# Altium PCB TCS230颜色识别.PCBDOC
Units mm, origin at the board's own origin, x right, y up, seen from the top; angles counter-clockwise.
Board outline 152.4 x 101.6 mm, 2 copper layers (Top Layer, Bottom Layer); 14 components, 7 nets, 40 pads, 2 vias.
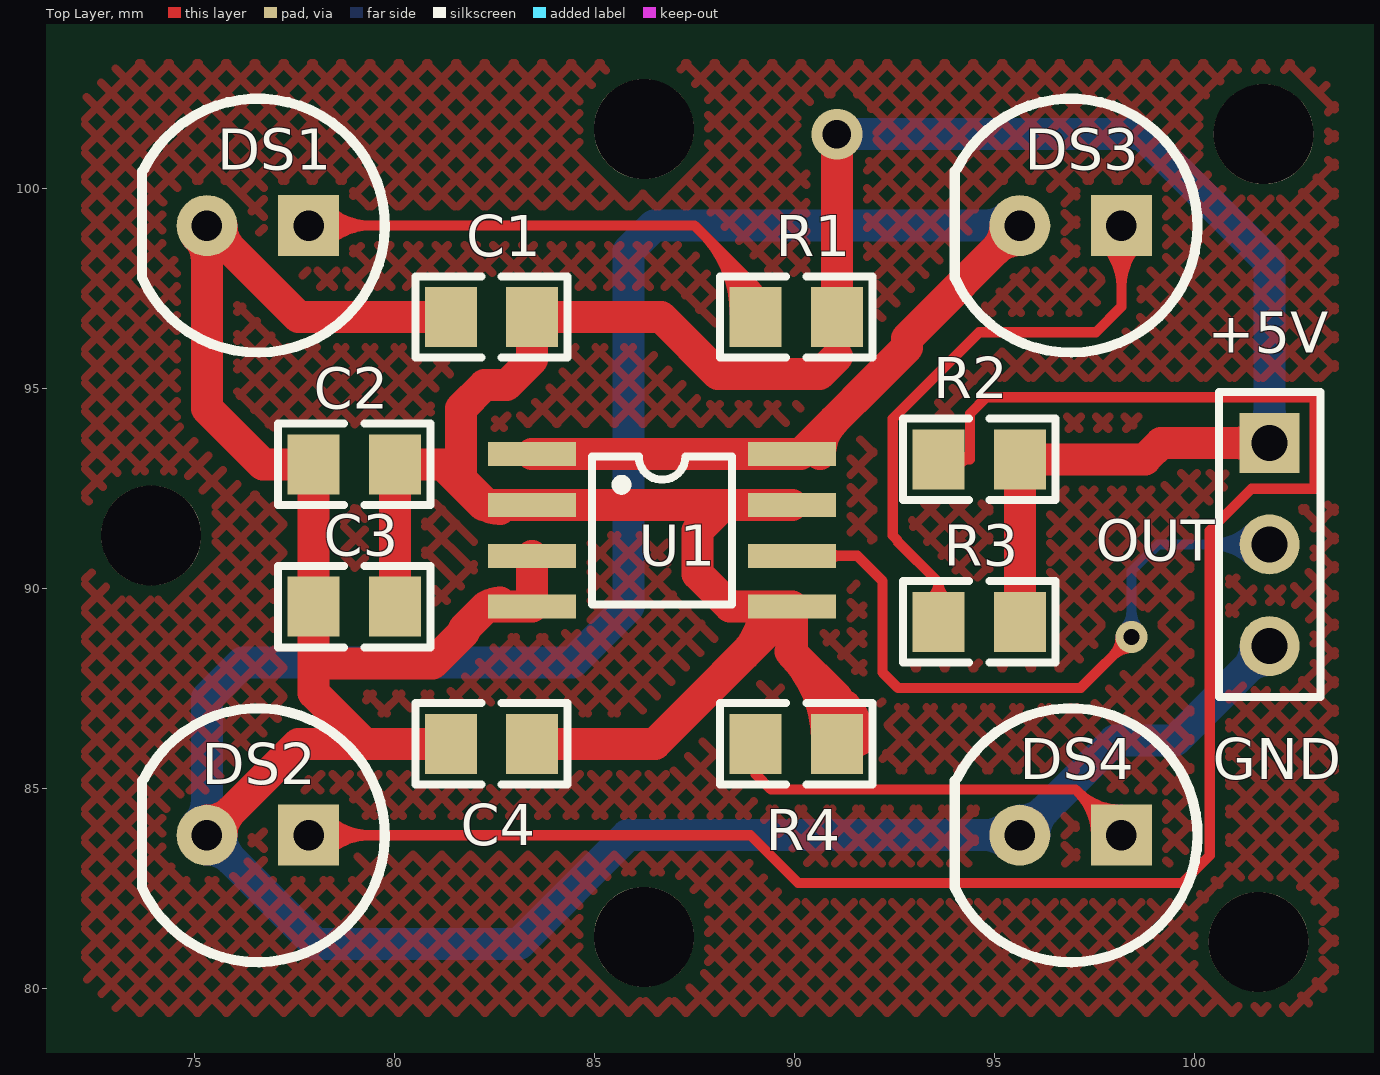
[diagram p0: Top Layer view]
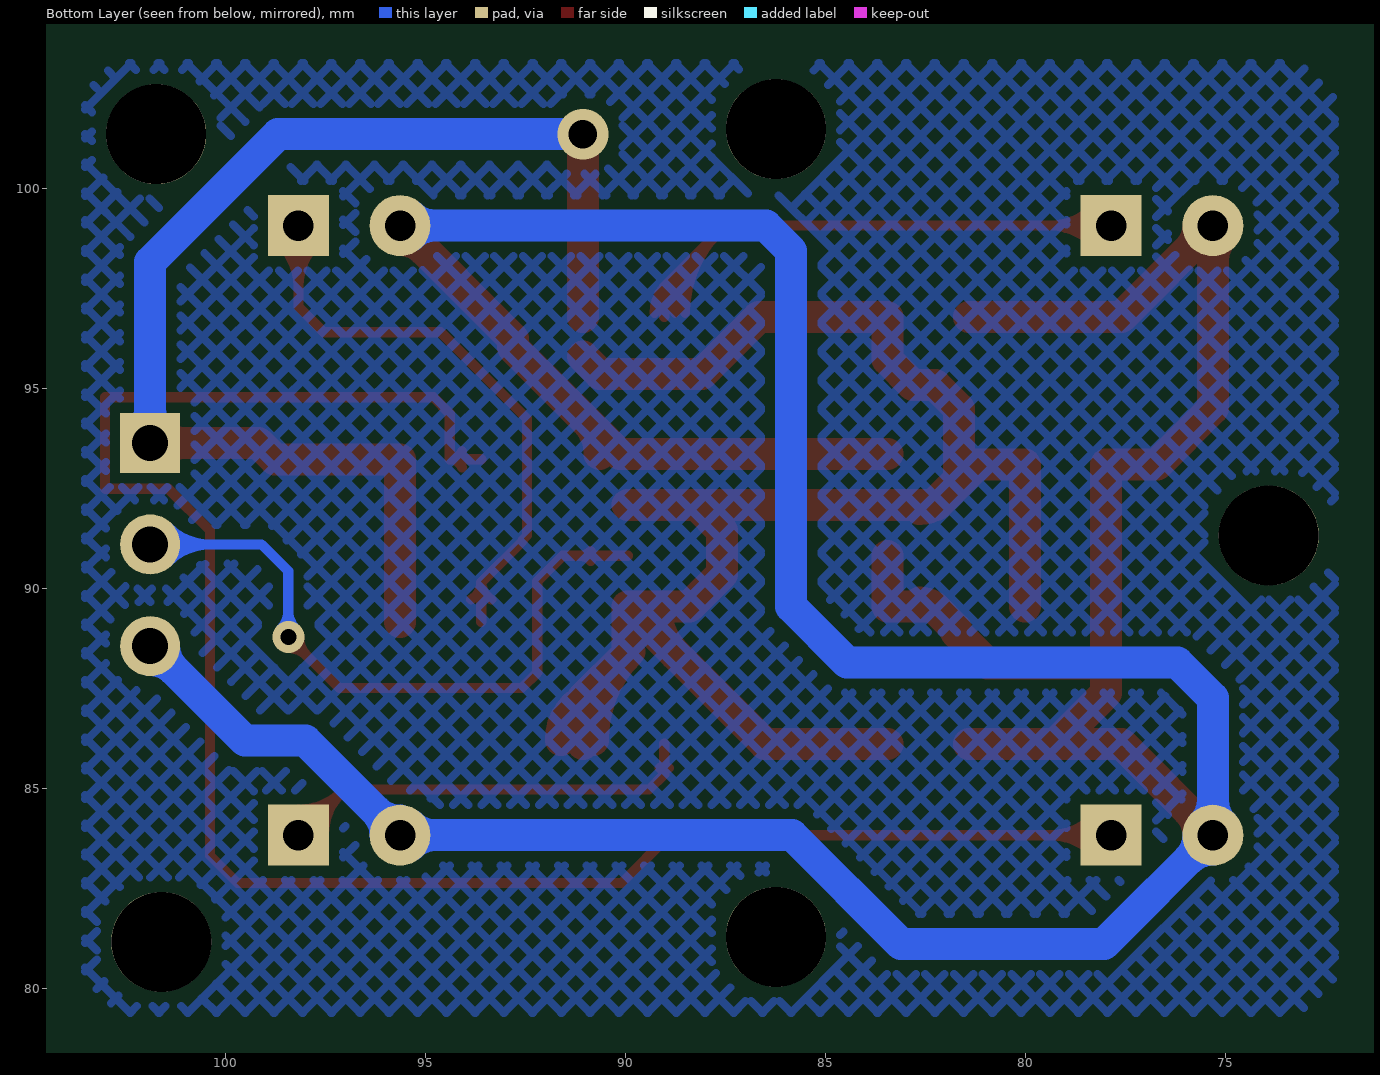
[diagram p1: Bottom Layer view, seen from below]

## Layer stack, top to bottom
Top Layer: signal copper 0.0356
Dielectric: dielectric 0.32, FR-4, Dk 4.8
Bottom Layer: signal copper 0.0356

## Board outline
25.4,25.4 177.8,25.4 177.8,127 25.4,127

## Design rules (kind name [scope] priority, off if disabled: settings)
Clearance [All] p1: gap=0.254
ComponentClearance [All] p1: gap=0.254 collisioncheckmode=3 verticalgap=0.254
PolygonConnect [All] p1: connectstyle=Relief reliefconductorwidth=0.254 reliefentries=4 polygonreliefangle="90 Angle"
RoutingVias [All] p1: holewidth=0.711 width=1.27 viastyle="Through Hole" minholewidth=0.711 minwidth=1.27 maxholewidth=0.711 maxwidth=1.27
SolderMaskExpansion [All] p1: expansion=0.102
TestPointUsage [All] p1: valid=0 allowmultiple=FALSE
Testpoint [All] p1: side=15 testpointundercomponent=TRUE minsize=1.016 maxsize=2.54 preferedsize=1.524 minholesize=0 maxholesize=1.016 preferedholesize=0.813 testpointgrid=0.025 style=1023 order=0123456789
Width Width_2 [InNet('GND')] p1: maxlimit=0.8 minlimit=0.8 preferedwidth=0.8
Width Width_1 [InNet('VCC')] p2: maxlimit=0.8 minlimit=0.8 preferedwidth=0.8
Width [All] p3: maxlimit=0.254 minlimit=0.254 preferedwidth=0.254
17 further rules are at their usual default settings.

## Components (designator, comment, footprint, x,y, rotation, side; value= is the part's Value field where it differs from the comment)
C1 "" TP-0805-R 84.963,95.504 r0 top
C2 "" TP-0805-R 81.534,91.821 r0 top
C3 "" TP-0805-R 81.534,88.265 r0 top
C4 "" TP-0805-R 84.963,84.836 r0 top
DS1 "LED1" LED_5 75.311,96.52 r180 top
DS2 "LED1" LED_5 75.311,81.28 r180 top
DS3 "LED1" LED_5 95.631,96.52 r180 top
DS4 "LED1" LED_5 95.631,81.28 r180 top
JP1 "PZ_3" HDR-3 100.711,87.376 r270 top
R1 "Res2" TP-0805-R 92.583,95.504 r0 top
R2 "Res2" TP-0805-R 97.155,91.948 r0 top
R3 "Res2" TP-0805-R 97.155,87.884 r0 top
R4 "Res2" TP-0805-R 92.583,84.836 r0 top
U1 "TCS230" CDFP-8 82.931,88.9 r270 top

## Footprints (in the part's own frame and the unit in brackets; to place one, negate y for a bottom-side part, rotate by r counter-clockwise, add the part's x,y. Pads: shape width x height; smd on the part's side, far side on the other; paste and mask are expansions set on the pad)
CDFP-8 [mm] "贴片8管脚"
  rect 0.6x2.2 smd: 1(-4.445,0.508) 2(-3.175,0.508) 3(-1.905,0.508) 4(-0.635,0.508) 5(-0.635,7.008) 6(-1.905,7.008) 7(-3.175,7.008) 8(-4.445,7.008)
  silkscreen extent -4.39,2.01 -0.69,5.51
HDR-3 [mm] "3排针"
  rect 1.5x1.5 hole 0.9: 1(-6.253,1.165)
  round 1.5 hole 0.9: 2(-3.713,1.165) 3(-1.173,1.165)
  silkscreen extent -7.52,-0.11 0.1,2.43
LED_5 [mil] "发光二极管 5MM"
  rect 60x60 hole 30: 1(-100,-100)
  round 60 hole 30: 2(0,-100)
  silkscreen extent -175,-225 64,25
TP-0805-R [mm] "贴片0805"
  rect 1.3x1.5 smd: 1(-3.556,1.27) 2(-1.524,1.27)
  silkscreen extent -4.44,0.25 -0.64,2.29

## Part data
C1 C2 C3 C4: library part CPDR, "瓷片电容"
DS1 DS2 DS3 DS4: "Typical RED GaAs LED"
JP1: "排针——3"
R1 R2 R3 R4: "Resistor"
U1: "颜色识别传感器"

## Free pads (board coordinates)
  round 2.5 hole 2.5: 6(73.914,91.313) 6(86.233,81.28) 6(86.233,101.473) 6(101.6,81.153) 6(101.727,101.346)

## Via types
v1: diameter 1.27, hole 0.711, Top Layer to Bottom Layer, 1 vias
v2: diameter 0.8, hole 0.4, Top Layer to Bottom Layer, 1 vias

## Nets (pads, with @x,y where several pads share a name; then routed paths per layer and width w, separated by ;. In a path a pad name is that pad's centre, name@x,y a point inside that pad or via, vN(x,y) a via of type N, cw(c..) or ccw(c..) an arc to the next point about the centre after c; other vN are vias at no path point)
GND: C1.1 C2.1 C3.1 C4.1 DS1.2 DS2.2 DS3.2 DS4.2 JP1.3 U1.1 U1.3 U1.4 U1.8 | length 131.6
  Top Layer w0.8: DS1.2@75.055,98.804 cw(c74.437,98.186) 75.311,98.186 cw(c76.185,98.186) DS1.2@75.567,98.804 ; DS2.2 77.597,86.106 79.248,86.106 ; DS2.2@75.311,84.182 ccw(c75.311,85.056) 75.929,84.438 ccw(c76.547,83.82) DS2.2@75.673,83.82 ; DS1.2@75.311,98.698 cw(c75.311,97.824) 75.929,98.442 cw(c76.547,99.06) DS1.2@75.673,99.06 ; C4.1 79.248,86.106 ; C1.1 77.597,96.774 DS1.2 75.311,94.488 76.708,93.091 C2.1 C3.1 77.978,88.113 ; U1.3 U1.4 82.296,89.535 81.737,88.976 81.737,88.9 80.95,88.113 77.978,88.113 ; U1.1 U1.8 90.145,93.345 92.812,96.012 92.812,96.241 DS3.2 ; U1.8@90.639,93.345 cw(c91.833,93.345) 90.989,94.189 ; DS3.2@95.269,99.06 cw(c94.395,99.06) 95.013,98.442 cw(c95.631,97.824) DS3.2@95.631,98.698 ; 77.978,88.113 77.978,87.376 79.248,86.106 ; 82.224,89.463 cw(c82.639,89.048) 82.639,89.635 ccw(c82.639,89.048) 82.224,89.463
  Bottom Layer w0.8: DS2.2@75.055,84.076 ccw(c74.437,84.694) 75.311,84.694 ccw(c76.185,84.694) DS2.2@75.567,84.076 ; DS2.2@75.311,83.458 cw(c75.311,82.584) 75.929,83.202 cw(c76.547,83.82) DS2.2@75.673,83.82 ; DS4.2@95.375,83.564 ccw(c94.757,82.946) 94.757,83.82 ccw(c94.757,84.694) DS4.2@95.375,84.076 ; DS3.2@95.375,98.804 ccw(c94.757,98.186) 94.757,99.06 ccw(c94.757,99.934) DS3.2@95.375,99.316 ; DS4.2@95.631,84.182 ccw(c95.631,85.056) 96.249,84.438 ccw(c96.867,83.82) DS4.2@95.993,83.82 ; DS3.2 86.487,99.06 85.852,98.425 85.852,89.535 84.455,88.138 76.2,88.138 75.311,87.249 DS2.2 78.029,81.102 83.109,81.102 85.827,83.82 DS4.2 97.993,86.182 99.509,86.182 JP1.3 ; JP1.3@101.526,88.549 cw(c100.681,88.549) 101.279,87.952 cw(c101.876,87.354) JP1.3@101.876,88.199
NetDS1_1: DS1.1 R1.1 | length 22.9
  Top Layer w0.254: DS1.1 87.503,99.06 89.027,97.536 ; DS1.1@78.12,98.791 cw(c78.771,98.14) 78.771,99.06 cw(c78.771,99.98) DS1.1@78.12,99.329 ; DS1.1@78.3,98.611 cw(c79.384,97.527) 79.384,99.06 cw(c79.384,100.593) DS1.1@78.3,99.509 ; 87.666,98.897 cw(c85.643,96.874) R1.1@88.504,96.874 ; 88.1,98.463 cw(c86.51,96.874) R1.1@88.758,96.874 ; 88.533,98.03 cw(c87.378,96.874) R1.1@89.012,96.874 ; R1.1@88.906,97.383 ccw(c88.87,97.536) 89.027,97.536 ; 88.967,97.596 cw(c88.245,96.874) R1.1@89.266,96.874 ; R1.1 89.027,97.536 ; R1.1@89.148,97.383 cw(c89.184,97.536) 89.027,97.536
NetDS2_1: DS2.1 R2.1 | length 52.1
  Top Layer w0.254: DS2.1 88.9,83.82 90.094,82.626 99.695,82.626 100.381,83.312 100.381,91.44 101.422,92.481 103.007,92.481 103.007,94.767 94.793,94.767 94.386,94.361 94.386,93.218 ; DS2.1@78.12,83.551 cw(c78.771,82.9) 78.771,83.82 cw(c78.771,84.74) DS2.1@78.12,84.089 ; DS2.1@78.3,83.371 cw(c79.384,82.287) 79.384,83.82 cw(c79.384,85.353) DS2.1@78.3,84.269 ; R2.1 94.386,93.218 ; R2.1@94.081,93.015 cw(c94.386,92.887) 94.386,93.218 ; R2.1@94.081,93.421 ccw(c94.386,93.549) 94.386,93.218
NetDS3_1: DS3.1 R3.1 | length 19.4
  Top Layer w0.254: R3.1@93.344,89.711 ccw(c93.102,90.145) 93.599,90.145 ; R3.1 93.599,90.145 ; R3.1@93.854,89.711 cw(c94.096,90.145) 93.599,90.145 ; DS3.1@97.722,98.611 cw(c96.638,97.527) 98.171,97.527 cw(c99.704,97.527) DS3.1@98.62,98.611 ; DS3.1@97.902,98.791 cw(c97.251,98.14) 98.171,98.14 cw(c99.091,98.14) DS3.1@98.44,98.791 ; DS3.1 98.171,97.028 97.536,96.393 94.615,96.393 92.456,94.234 92.456,91.313 92.558,91.211 92.558,91.186 93.599,90.145
NetDS4_1: DS4.1 R4.1 | length 15.2
  Top Layer w0.254: R4.1 89.027,85.344 ; DS4.1@97.536,83.82 ccw(c96.003,83.82) 97.087,84.904 ccw(c98.171,85.988) DS4.1@98.171,84.455 ; DS4.1@97.79,83.82 ccw(c96.87,83.82) 97.521,84.47 ccw(c98.171,85.121) DS4.1@98.171,84.201 ; DS4.1 97.028,84.963 89.408,84.963 89.027,85.344 ; 89.027,85.344 cw(c89.184,85.344) 89.148,85.497 ccw(c89.184,85.344) 89.027,85.344 ; 89.027,85.344 ccw(c88.87,85.344) 88.906,85.497 cw(c88.87,85.344) 89.027,85.344
NetJP1_2: JP1.2 U1.6 | length 23.6
  Top Layer w0.254: U1.6 91.567,90.805 92.202,90.17 92.202,87.884 92.583,87.503 97.155,87.503 v2(98.425,88.773) ; U1.6@90.861,90.683 cw(c91.157,90.387) 91.157,90.805 cw(c91.157,91.223) U1.6@90.861,90.927 ; v2@98.152,88.773 cw(c97.493,88.773) 97.959,88.307 cw(c98.425,87.841) v2@98.425,88.5
  Bottom Layer w0.254: v2@98.232,88.966 ccw(c97.766,89.432) 98.425,89.432 ccw(c99.084,89.432) v2@98.618,88.966 ; v2(98.425,88.773) 98.425,90.424 99.09,91.089 JP1.2 ; JP1.2@101.435,90.648 ccw(c100.372,89.585) 100.372,91.089 ccw(c100.372,92.593) JP1.2@101.435,91.53 ; JP1.2@101.615,90.828 ccw(c100.985,90.198) 100.985,91.089 ccw(c100.985,91.98) JP1.2@101.615,91.35
VCC: C1.2 C2.2 C3.2 C4.2 JP1.1 R1.2 R2.2 R3.2 R4.2 U1.2 U1.5 U1.7 | length 85
  Top Layer w0.8: C3.2 C2.2 81.204,93.091 82.22,92.075 82.296,92.075 ; 82.094,92.201 ccw(c82.639,92.746) 82.639,91.975 cw(c82.639,92.562) 82.224,92.147 ; C4.2 86.51,86.106 U1.5 ; 88.744,88.34 ccw(c87.549,89.535) U1.5@89.239,89.535 ; 89.895,88.413 cw(c87.687,86.206) R4.2@90.809,86.206 ; U1.7 88.214,92.075 ; R4.2 91.059,87.249 89.939,88.369 U1.5 ; 91.059,95.783 90.627,95.352 88.087,95.352 86.665,96.774 C1.2 83.439,95.707 82.804,95.072 82.245,95.072 81.661,94.488 81.661,92.71 82.296,92.075 ; R1.2 v1(91.059,101.346) ; 91.26,87.048 cw(c90.419,86.206) R4.2@91.609,86.206 ; R3.2 R2.2 98.755,93.218 99.166,93.629 JP1.1 ; JP1.1@101.629,93.382 ccw(c101.031,92.784) 101.031,93.629 ccw(c101.031,94.474) JP1.1@101.629,93.877 ; 82.296,92.075 U1.2 88.214,92.075 ; 88.214,92.075 87.579,91.44 87.579,90.348 88.392,89.535 U1.5
  Bottom Layer w0.8: v1(91.059,101.346) 98.679,101.346 101.876,98.149 JP1.1 ; JP1.1@101.629,93.877 ccw(c101.031,94.474) 101.876,94.474 ccw(c102.721,94.474) JP1.1@102.123,93.877

## Polygon pours and split planes (outlines as drawn)
no net on Top Layer (hatched 45Degree grid 0.508 track 0.203): 72.263,102.235 73.152,103.124 102.743,103.124 103.505,102.362 103.505,80.264 102.616,79.375 73.152,79.375 72.263,80.264
no net on Bottom Layer (hatched 45Degree grid 0.508 track 0.203): 72.263,102.235 73.152,103.124 102.743,103.124 103.505,102.362 103.505,80.264 102.616,79.375 73.152,79.375 72.39,80.137 72.263,80.264

## Silkscreen, mask and mechanical layers (free items; w line width, h text height)
Top Overlay:
  text "+5V" at 100.33,95.885 h1.02
  text "OUT" at 97.536,90.678 h1.02
  text "GND" at 100.457,85.217 h1.02
Mechanical 1:
  lines w0.5: 71.628,80.772 71.628,81.153 ; 71.628,101.727 71.628,101.981 ; 75.184,83.947 75.311,83.82 ; 98.044,99.06 98.171,98.933 ; 101.727,103.886 102.235,103.886 ; 71.628,79.883 72.771,78.74 103.124,78.74 104.267,79.883 104.267,102.743 103.124,103.886 72.771,103.886 71.628,102.743 71.628,79.883